# Altium PCB AirPi_Power.PcbDoc
Units mm, origin at the board's own origin, x right, y up, seen from the top; angles counter-clockwise.
Board outline 80.9 x 56.52 mm, 2 copper layers (Top Layer, Bottom Layer); 44 components, 29 nets, 174 pads, 33 vias.
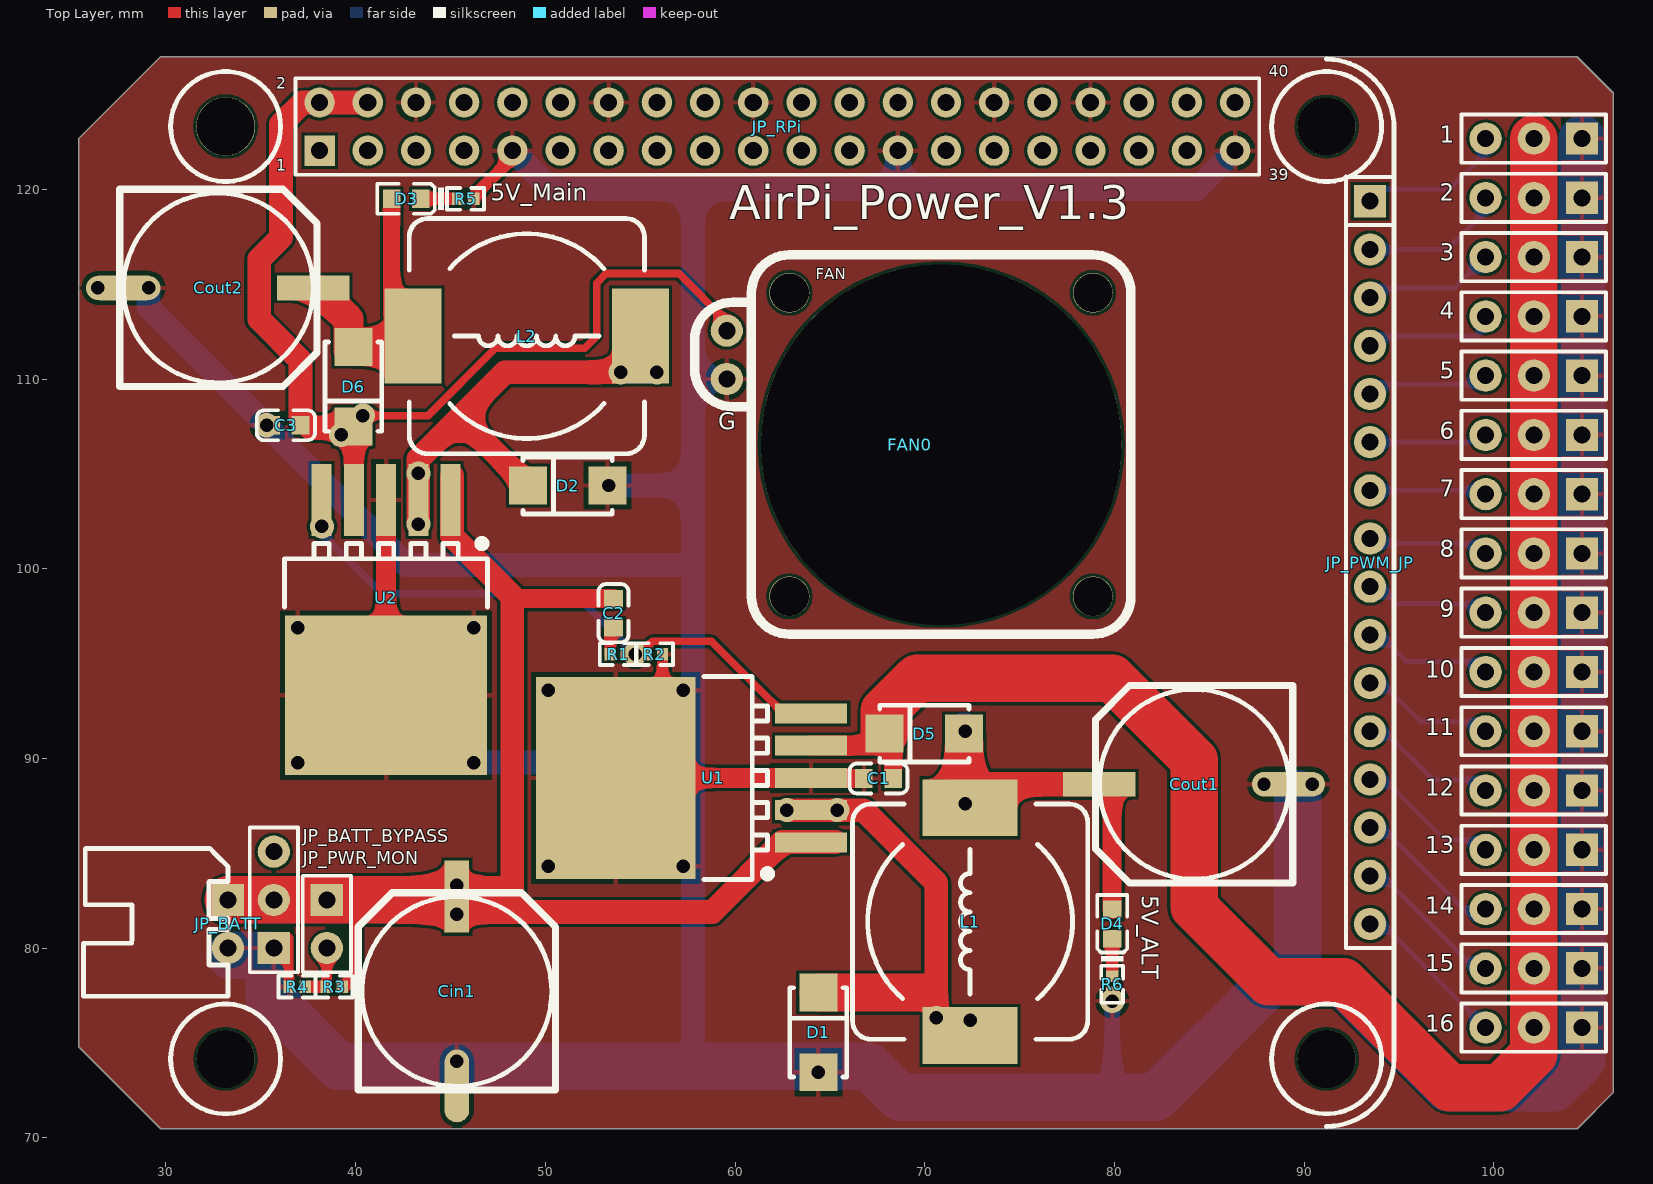
[diagram p0: Top Layer view]
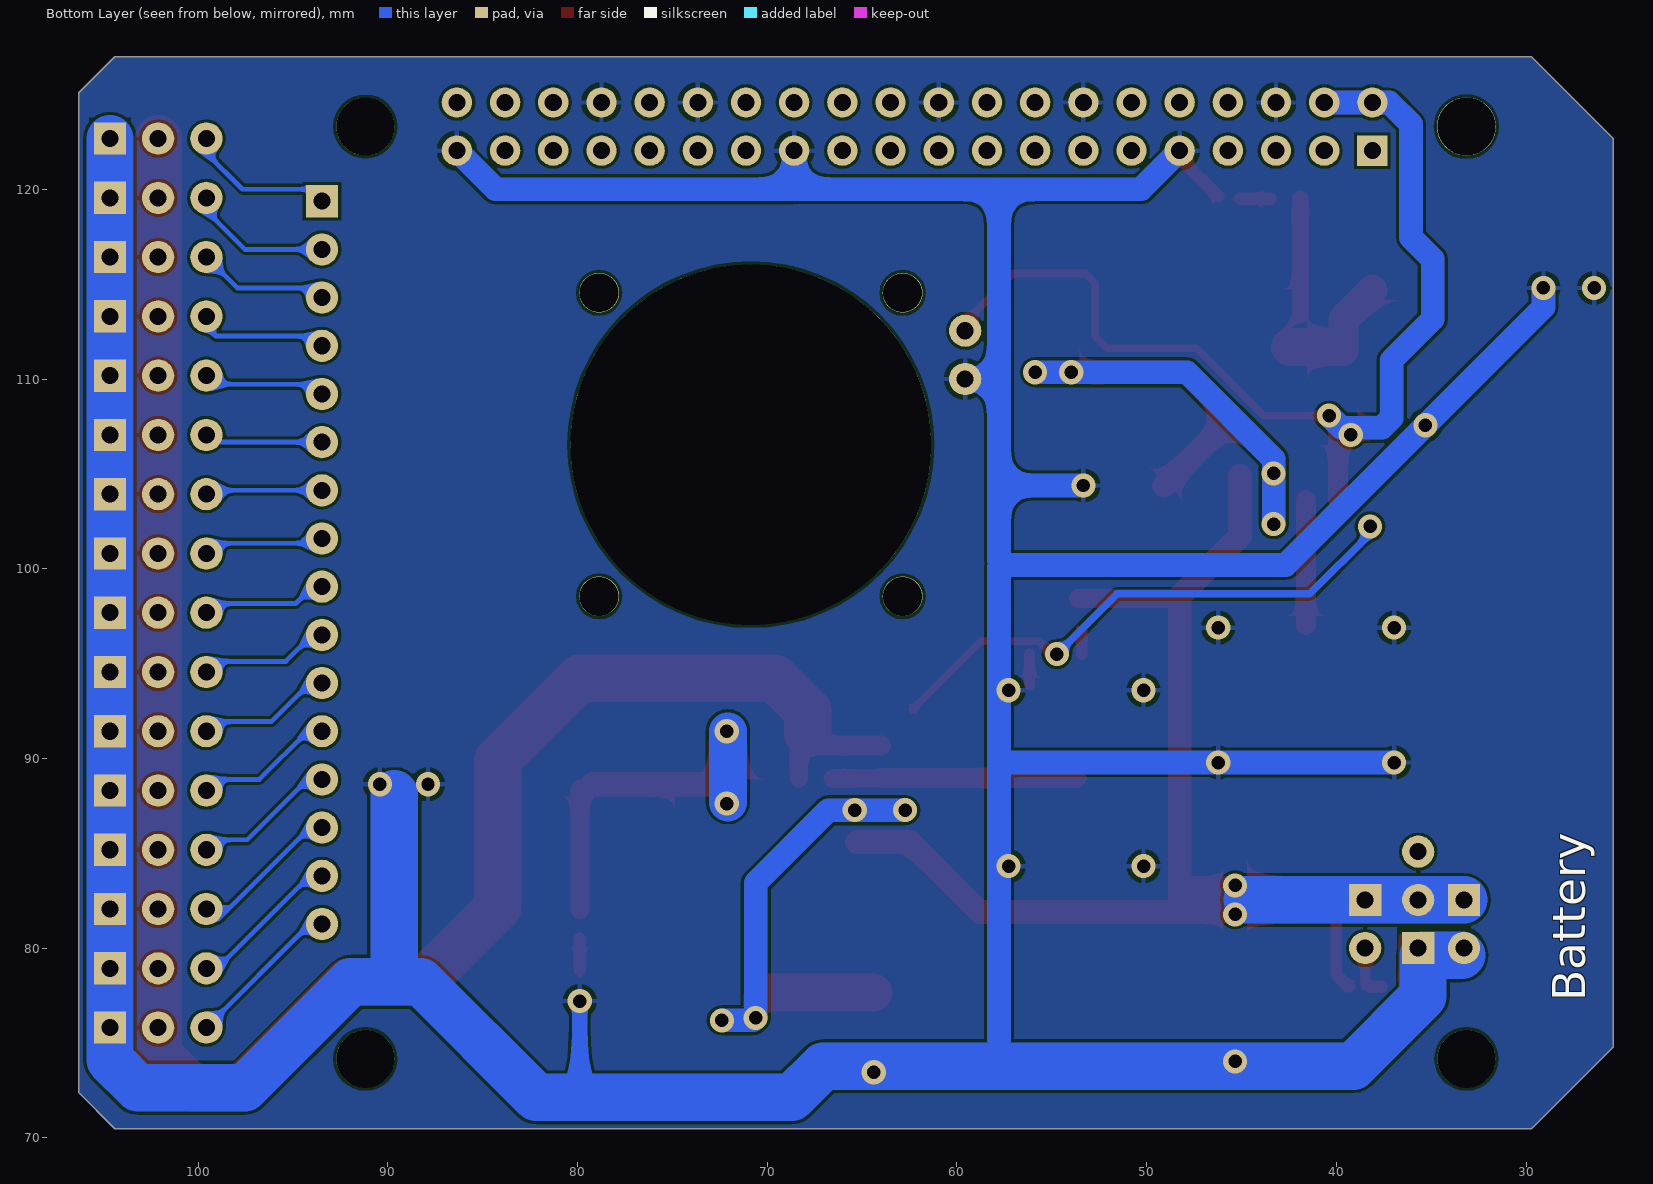
[diagram p1: Bottom Layer view, seen from below]

## Layer stack, top to bottom
Top Solder: solder mask 0.0102, Solder Resist, Dk 3.5
Top Layer: signal copper 0.0356
Dielectric 1: dielectric 0.32, FR-4, Dk 4.8
Bottom Layer: signal copper 0.0356
Bottom Solder: solder mask 0.0102, Solder Resist, Dk 3.5

## Board outline
29.718,127 25.4,122.682 25.4,74.803 29.718,70.485 104.394,70.485 106.299,72.39 106.299,125.095 104.394,127

## Design rules (kind name [scope] priority, off if disabled: settings)
Clearance [All] p1: gap=0.152 ignorepadtopadclearanceinfootprint=TRUE except(0: Arc-Hole Track-Hole SMDPad-Hole THPad-Hole Via-Hole Fill-Hole Poly-Hole Region-Hole Text-Hole)
DiffPairsRouting [All] p1: maxlimit=10 minlimit=0.152 mostfreqgap=0.254 toplayer_minwidth=0.152 toplayer_maxwidth=10 toplayer_prefwidth=0.254 bottomlayer_minwidth=0.152 bottomlayer_maxwidth=10 bottomlayer_prefwidth=0.254 maxuncoupledlength=12.7
PlaneConnect [All] p1: pad.planeconnectstyle=Relief pad.reliefexpansion=0.508 pad.reliefentries=4 pad.reliefconductorwidth=0.508 pad.reliefairgap=0.152 via.planeconnectstyle=Relief via.reliefexpansion=0.508 via.reliefentries=4 via.reliefconductorwidth=0.254 via.reliefairgap=0.254
PolygonConnect [All] p1: connectstyle=Relief reliefconductorwidth=0.254 reliefentries=4 polygonreliefangle="90 Angle" airgapwidth=0.254
RoutingTopology [All] p1: topology=Daisy_Simple
RoutingVias [All] p1: holewidth=0.711 width=1.27 viastyle="Through Hole" minholewidth=0.3 minwidth=0.6 maxholewidth=5 maxwidth=10
SolderMaskExpansion [All] p1: expansion=0.102
UnRoutedNet [All] p1: checkbadconnections=TRUE
Width [All] p1: maxlimit=10 minlimit=0.152 preferedwidth=0.254
26 further rules are at their usual default settings.

## Classes and differential pairs
net class PWM[15..0]: PWM0 PWM1 PWM2 PWM3 PWM4 PWM5 PWM6 PWM7 PWM8 PWM9 PWM10 PWM11 PWM12 PWM13 PWM14 PWM15
component class V_div: R3 R4
component class "to sensor": JP_PWR_MON
component class PiHAT_Power: 1 2 3 4 5 6 7 8 9 10 11 12 13 14 15 16 JP_PWM_JP JP_RPi
component class LM2596_0: C1 C2 C3 Cin1 Cout2 D1 D2 D3 D4 D5 D6 L1 L2 R1 R2 R5 R6 U1 U2
component class Fan: FAN0
component class Batt_src: JP_BATT
component class Batt_bypass: JP_BATT_BYPASS

## Components (designator, comment, footprint, x,y, rotation, side; value= is the part's Value field where it differs from the comment)
1 "HDR-1X3" HDR2.54-LI-3P 102.108,122.682 r180 top locked (schematic designator CH1)
2 "HDR-1X3" HDR2.54-LI-3P 102.108,119.558 r180 top locked (schematic designator CH2)
3 "HDR-1X3" HDR2.54-LI-3P 102.108,116.434 r180 top locked (schematic designator CH3)
4 "HDR-1X3" HDR2.54-LI-3P 102.108,113.309 r180 top locked (schematic designator CH4)
5 "HDR-1X3" HDR2.54-LI-3P 102.108,110.185 r180 top locked (schematic designator CH5)
6 "HDR-1X3" HDR2.54-LI-3P 102.108,107.061 r180 top locked (schematic designator CH6)
7 "HDR-1X3" HDR2.54-LI-3P 102.108,103.937 r180 top locked (schematic designator CH7)
8 "HDR-1X3" HDR2.54-LI-3P 102.108,100.813 r180 top locked (schematic designator CH8)
9 "HDR-1X3" HDR2.54-LI-3P 102.108,97.688 r180 top locked (schematic designator CH9)
10 "HDR-1X3" HDR2.54-LI-3P 102.108,94.564 r180 top locked (schematic designator CH10)
11 "HDR-1X3" HDR2.54-LI-3P 102.108,91.44 r180 top locked (schematic designator CH11)
12 "HDR-1X3" HDR2.54-LI-3P 102.108,88.316 r180 top locked (schematic designator CH12)
13 "HDR-1X3" HDR2.54-LI-3P 102.108,85.192 r180 top locked (schematic designator CH13)
14 "HDR-1X3" HDR2.54-LI-3P 102.108,82.067 r180 top locked (schematic designator CH14)
15 "HDR-1X3" HDR2.54-LI-3P 102.108,78.943 r180 top locked (schematic designator CH15)
16 "HDR-1X3" HDR2.54-LI-3P 102.108,75.819 r180 top locked (schematic designator CH16)
C1 "100nF (104) 10% 50V" 0603_C 67.564,88.95 r0 top locked
C2 "100nF (104) 10% 50V" 0603_C 53.594,97.663 r90 top locked
C3 "100nF (104) 10% 50V" 0603_C 36.322,107.569 r0 top locked
Cin1 "220uF/50V" "CM F(10*10.2)" 45.339,77.724 r90 top locked
Cout1 "1000uF/16V" "CM F(10*10.2)" 84.201,88.646 r180 top locked
Cout2 "1000uF/16V" "CM F(10*10.2)" 32.766,114.808 r0 top locked
D1 "SS54" SMA(DO-214AC)_S1 64.389,75.565 r270 top locked
D2 "SS54" SMA(DO-214AC)_S1 51.181,104.394 r0 top locked
D3 "红灯 0603" 0603_LED_S1 42.672,119.507 r180 top locked
D4 "红灯 0603" 0603_LED_S1 79.883,81.28 r90 top locked
D5 "SS54" SMA(DO-214AC)_S1 69.977,91.313 r0 top locked
D6 "SS54" SMA(DO-214AC)_S1 39.878,109.601 r90 top locked
FAN0 "20mm_5V_风扇" 20mmFAN 62.867,98.552 r0 top locked
JP_BATT "HDR-1X2" XH2.54-WI-2P 33.274,81.28 r270 top locked
JP_BATT_BYPASS "HDR-1X3" HDR2.54-LI-3P 35.687,82.55 r90 top locked
JP_PWM_JP "HDR-1X16" HDR2.54-M-LI-16P 93.472,100.33 r270 top locked
JP_PWR_MON "HDR-1X2" HDR2.54-M-LI-2P 38.481,81.28 r270 top
JP_RPi "Header 2X11" HDR2.54-LI-2x20P 62.23,123.317 r0 top locked
L1 "47uH" CDRH127 72.39,81.407 r90 top locked
L2 "47uH" CDRH127 49.022,112.268 r180 top locked
R1 "47KΩ (4702) ±1%" 0402_R 53.848,95.504 r0 top locked
R2 "47KΩ (4702) ±1%" 0402_R 55.753,95.504 r180 top locked
R3 "4.7KΩ (4701) ±1%" 0402_R 38.862,77.978 r0 top locked
R4 "1KΩ (1001) ±1%" 0402_R 36.913,77.978 r0 top locked
R5 "1KΩ (1001) ±1%" 0402_R 45.796,119.507 r180 top locked
R6 "1KΩ (1001) ±1%" 0402_R 79.883,78.105 r90 top locked
U1 "LM2596SX-5.0/NOPB" TO-263-5 64.008,88.978 r0 top locked
U2 "LM2596SX-5.0/NOPB" TO-263-5 41.607,103.632 r90 top locked

## Footprints (in the part's own frame and the unit in brackets; to place one, negate y for a bottom-side part, rotate by r counter-clockwise, add the part's x,y. Pads: shape width x height; smd on the part's side, far side on the other; paste and mask are expansions set on the pad)
20mmFAN [mm] "20mm_5V_风扇"
  round 1.7 hole 0.9: 6(-3.3,11.46) 7(-3.3,14)
  round 2.1 hole 2.05: 8(0,0) 9(0,16) 10(16,16) 11(16,0)
  round 19 hole 19: 12(8,8)
  silkscreen extent -5,-2 18,18
0402_R [mm]
  rect 0.6x0.65 smd mask+0.051: 1(-0.425,0) 2(0.425,0)
  silkscreen extent -0.97,-0.58 0.97,0.58, body extent -0.57,-0.27 0.58,0.28, height 0.41
0603_C [mm]
  rect 0.93x0.98 smd: 1(-0.77,0) 2(0.77,0)
  silkscreen extent -1.53,-0.79 1.54,0.79, body extent -0.8,-0.4 0.8,0.4, height 0.3
0603_LED_S1 [mm]
  rect 0.93x0.98 smd: A(0.77,0) K(-0.77,0)
  silkscreen extent -1.98,-0.79 1.54,0.79, body extent -0.8,-0.4 0.8,0.4, height 0.6
CDRH127 [mm] "12*12*8mm（长宽高）"
  rect 3x5 smd: 1(-6,0) 2(6,0)
  silkscreen extent -6.2,-6.2 6.2,6.2, body extent -6,-6 6,6, height 7.8
"CM F(10*10.2)" [mm] "贴片电解电容，直径10mm，高10.2mm"
  rect 3.8x1.3 smd: 1(5,0)
  oval 3.8x1.3 smd: 2(-5,0)
  silkscreen extent -5.2,-5.2 5.2,5.2, body extent -5.8,-5.15 5.8,5.15, height 10.2
HDR2.54-LI-2x20P [mm] "双排排针，20x2脚"
  rect 1.6x1.6 hole 0.9: 1(-24.13,-1.27)
  round 1.6 hole 0.9: 2(-24.13,1.27) 3(-21.59,-1.27) 4(-21.59,1.27) 5(-19.05,-1.27) 6(-19.05,1.27) 7(-16.51,-1.27) 8(-16.51,1.27) 9(-13.97,-1.27) 10(-13.97,1.27) 11(-11.43,-1.27) 12(-11.43,1.27) 13(-8.89,-1.27) 14(-8.89,1.27) 15(-6.35,-1.27) 16(-6.35,1.27) 17(-3.81,-1.27) 18(-3.81,1.27) 19(-1.27,-1.27) 20(-1.27,1.27) 21(1.27,-1.27) 22(1.27,1.27) 23(3.81,-1.27) 24(3.81,1.27) 25(6.35,-1.27) 26(6.35,1.27) 27(8.89,-1.27) 28(8.89,1.27) 29(11.43,-1.27) 30(11.43,1.27) 31(13.97,-1.27) 32(13.97,1.27) 33(16.51,-1.27) 34(16.51,1.27) 35(19.05,-1.27) 36(19.05,1.27) 37(21.59,-1.27) 38(21.59,1.27) 39(24.13,-1.27) 40(24.13,1.27)
  silkscreen extent -25.4,-2.54 25.4,2.54, body extent -25.4,-2.54 25.4,2.54, height 8.5
HDR2.54-LI-3P [mm] "排针，3脚"
  rect 1.7x1.7 hole 0.9: 1(-2.54,0)
  round 1.7 hole 0.9: 2(0,0) 3(2.54,0)
  silkscreen extent -3.81,-1.27 3.81,1.27, body extent -3.81,-1.27 3.81,1.27, height 8.5
HDR2.54-M-LI-2P [mm] "排母，2脚"
  rect 1.7x1.7 hole 0.9: 1(-1.27,0)
  round 1.7 hole 0.9: 2(1.27,0)
  silkscreen extent -2.54,-1.27 2.54,1.27, body extent -2.54,-1.27 2.54,1.27, height 8.5
HDR2.54-M-LI-16P [mm] "排母，16脚"
  rect 1.7x1.7 hole 0.9: 1(-19.05,0)
  round 1.7 hole 0.9: 2(-16.51,0) 3(-13.97,0) 4(-11.43,0) 5(-8.89,0) 6(-6.35,0) 7(-3.81,0) 8(-1.27,0) 9(1.27,0) 10(3.81,0) 11(6.35,0) 12(8.89,0) 13(11.43,0) 14(13.97,0) 15(16.51,0) 16(19.05,0)
  silkscreen extent -20.32,-1.27 20.32,1.27, body extent -20.32,-1.27 20.32,1.27, height 8.5
SMA(DO-214AC)_S1 [mm]
  rect 2x2 smd: 1(2.1,0) 2(-2.1,0)
  silkscreen extent -2.35,-1.5 2.35,1.5
TO-263-5 [mm]
  rect 3.8x1.05 smd: 1(0,-3.4) 2(0,-1.7) 3(0,0) 4(0,1.7) 5(0,3.4)
  rect 8.4x10.65 smd: ""(-10.3,0)
  silkscreen extent -5.65,-5.35 -2.1,5.35
XH2.54-WI-2P [mm] "接插件，2P"
  rect 1.7x1.7 hole 0.9: 1(-1.27,0)
  round 1.7 hole 0.9: 2(1.27,0)
  silkscreen extent -3.99,-7.62 3.81,0, body extent -3.77,-7.35 3.77,0.35, height 5.73

## Part data
1 2 3 4 5 6 7 8 9 10 11 12 13 14 15 16 JP_BATT_BYPASS: library part "Header 3", "3P接插件", BOM名称=3P接插件, 学习资源=www.ooocke.com, 版权归属=源创客
C1 C2 C3: library part "0603 100nF (104) 10% 50V", "贴片电容", Package=0603, SuppliersPartNumber=C14663, ComponentLink1Description=供应商链接, ComponentLink1URL=http://www.szlcsc.com/product/details_15331.html, Supplier=LC
Cin1 Cout1 Cout2: library part C-CM, "贴片电解电容"
D1 D2 D5 D6: library part "SMA(DO-214AC) SS54", "二极管", Package=SMA(DO-214AC), SuppliersPartNumber=C22452, ComponentLink1Description=供应商链接, ComponentLink1URL=http://www.szlcsc.com/product/details_23178.html, Supplier=LC
D3 D4: library part "0603 红灯", "发光二极管", Package=0603, SuppliersPartNumber=C2286, ComponentLink1Description=供应商链接, ComponentLink1URL=http://www.szlcsc.com/product/details_2659.html, Supplier=LC
FAN0: library part 20mmFAN
JP_BATT JP_PWR_MON: library part "Header 2", "2P接插件", BOM名称=2P接插件, 学习资源=www.ooocke.com, 版权归属=源创客
JP_PWM_JP: library part "Header 16", "16P接插件", BOM名称=16P接插件, 学习资源=www.ooocke.com, 版权归属=源创客
JP_RPi: library part "Header 20X2", "20*2P接插件"
L1 L2: library part L-CDRH, "功率屏蔽电感"
R1 R2: library part "0402 47KΩ (4702) 1%", "贴片电阻", Package=0402, SuppliersPartNumber=C25792, ComponentLink1Description=供应商链接, ComponentLink1URL=http://www.szlcsc.com/product/details_26535.html, Supplier=LC
R3: library part "0402 4.7KΩ (4701) 1%", "贴片电阻", Package=0402, SuppliersPartNumber=C25900, ComponentLink1Description=供应商链接, ComponentLink1URL=http://www.szlcsc.com/product/details_26643.html, Supplier=LC
R4 R5 R6: library part "0402 1KΩ (1001) 1%", "贴片电阻", Package=0402, SuppliersPartNumber=C11702, ComponentLink1Description=供应商链接, ComponentLink1URL=http://www.szlcsc.com/product/details_12256.html, Supplier=LC
U1 U2: library part LM2596SX-5.0/NOPB_[C10002], "DC-DCоƬ", Package=TO-263-5, SuppliersPartNumber=C10002, ComponentLink1Description=供应商链接, ComponentLink1URL=http://www.szlcsc.com/product/details_10538.html, Supplier=LC

## Free pads (board coordinates)
  round 3.1 hole 3.05: FH0(33.147,123.317)
  round 3.05 hole 3.05: FH1(91.186,123.317) FH2(91.186,74.168) FH3(33.147,74.168)

## Via types
v1: diameter 1.27, hole 0.711, Top Layer to Bottom Layer, 33 vias

## Nets (pads, with @x,y where several pads share a name; then routed paths per layer and width w, separated by ;. In a path a pad name is that pad's centre, name@x,y a point inside that pad or via, vN(x,y) a via of type N, cw(c..) or ccw(c..) an arc to the next point about the centre after c; other vN are vias at no path point)
5V: C3.2 D6.2 FAN0.7 JP_RPi.2 JP_RPi.4 U2.4 | length 80
  Top Layer w0.254: D6.2@39.81,107.569 D6.2 D6.2@39.907,107.472
  Top Layer w0.4: v1(40.386,108.077) 43.815,108.077 47.371,111.633 52.07,111.633 52.705,112.268 52.705,115.062 53.213,115.57 57.023,115.57 59.567,113.026 FAN0.7
  Top Layer w1.05: U2.4 D6.2@39.907,107.472
  Top Layer w1.25: D6.2@39.878,107.442 37.592,107.442 37.092,107.942 37.092,110.99 34.925,113.157 34.925,116.332 36.068,117.475 36.068,123.444 37.211,124.587 JP_RPi.2 JP_RPi.4
  Bottom Layer w1.25: v1(40.386,108.077) 39.751,107.442 37.592,107.442 37.084,107.95 37.084,110.998 34.925,113.157 34.925,116.332 36.068,117.475 36.068,123.444 37.211,124.587 JP_RPi.2 JP_RPi.4
  other v1: 39.243,107.061
5V_ALT: 1.2 2.2 3.2 4.2 5.2 6.2 7.2 8.2 9.2 10.2 11.2 12.2 13.2 14.2 15.2 16.2 C1.2 D5.2 U1.4 | length 105.3
  Top Layer w0.254: D5.2@67.242,90.678 D5.2 D5.2@68.334,90.856
  Top Layer w0.94: C1.2 D5.2@68.334,90.856
  Top Layer w1.05: U1.4 D5.2@67.242,90.678
  Top Layer w2.5: D5.2 67.877,92.515 69.596,94.234 79.883,94.234 84.201,89.916 84.201,82.169 88.138,78.232 92.075,78.232 97.663,72.644 100.33,72.644 102.108,74.422 16.2 14.2 12.2 11.2 10.2 8.2 5.2 3.2 1.2
GND: 1.1 2.1 3.1 4.1 5.1 6.1 7.1 8.1 9.1 10.1 11.1 12.1 13.1 14.1 15.1 16.1 C1.1 C3.1 Cin1.2 Cout1.2 Cout2.2 D1.1 D2.1 FAN0.6 JP_BATT.2 JP_BATT_BYPASS.1 JP_RPi.6 JP_RPi.9 JP_RPi.14 JP_RPi.20 JP_RPi.25 JP_RPi.30 JP_RPi.34 JP_RPi.39 R2.1 R4.1 R5.1 R6.1 U1. U1.3 U2. U2.3 | length 319.3
  Top Layer w0.254: U1.3 U1.3@64.036,88.95
  Top Layer w0.5: R4.1 JP_BATT_BYPASS.1@36.488,80.518
  Top Layer w0.6: U1.@56.178,93.897 R2.1
  Top Layer w0.65: R5.1@46.221,119.627 JP_RPi.9@48.133,121.539
  Top Layer w0.97: U1.3@64.036,88.95 C1.1@66.548,88.95
  Top Layer w1.05: U2.@41.607,97.028 U2.3 ; U1. U1.3
  Bottom Layer w0.8: 79.883,72.136 v1(79.883,77.216)
  Bottom Layer w1.25: v1(29.083,114.808) 29.083,113.792 v1(35.306,107.569) 42.672,100.203 57.531,100.203 57.785,100.457 57.785,104.394 ; v1@37.084,89.789 56.769,89.789 57.785,89.789 57.785,93.599 57.785,100.076 ; JP_RPi.9 50.292,120.015 57.785,120.015 ; v1(53.34,104.394) 57.785,104.394 ; 57.785,75.184 57.785,89.535 ; FAN0.6 59.537,109.982 57.785,109.982 ; JP_RPi.25 68.58,120.015 ; JP_RPi.39 84.328,120.015 68.58,120.015 ; 57.785,104.394 57.785,109.982 ; 57.785,109.982 57.785,120.015 ; 57.785,120.015 68.58,120.015
  Bottom Layer w2.5: JP_BATT.2@33.401,79.629 35.433,79.629 35.433,77.47 39.116,73.787 45.339,73.787 64.389,73.787 67.056,73.787 68.707,72.136 79.883,72.136 82.169,72.136 88.265,78.232 89.662,78.232 ; 89.662,88.138 89.662,78.232 ; 1.1 3.1 5.1 6.1 8.1 10.1 11.1 12.1 14.1 16.1 104.648,74.108 103.184,72.644 97.536,72.644 91.948,78.232 89.662,78.232
  other v1: 64.389,73.465 45.339,74.041 50.165,84.328 57.277,84.328 87.884,88.646 90.424,88.646 36.957,89.789 46.228,89.789 50.165,93.599 57.277,93.599 36.957,96.901 46.228,96.901 26.416,114.808
LED: Cout2.1 D3.A D6.1 L2.2 | length 14.9
  Top Layer w0.254: L2.2@41.902,113.388 L2.2 L2.2@42.455,111.701
  Top Layer w0.9: L2.2@41.902,113.388 D3.A
  Top Layer w1.6: Cout2.1@38.1,114.681 39.624,113.157 D6.1@39.624,111.506
  Top Layer w2: D6.1 L2.2@42.455,111.701
LED_ALT: Cout1.1 D4.A D5.1 L1.2 | length 20.5
  Top Layer w1: D4.A Cout1.1@79.883,88.392
  Top Layer w1.3: L1.2@72.39,88.646 Cout1.1
  Top Layer w2: L1.2@72.077,87.72 D5.1
  Bottom Layer w2: v1@72.077,87.689 v1@72.077,91.439
  other v1: 72.136,87.63 72.136,91.44
NetC2_1: C2.1 R1.1 | length 1.5
  Top Layer w0.254: C2.1@53.423,96.722 C2.1
  Top Layer w0.6: R1.1 C2.1@53.423,96.722
NetC2_2: C2.2 Cin1.1 JP_BATT.1 JP_BATT_BYPASS.2 JP_PWR_MON.1 R3.2 U1.1 U2.1 | length 78.9
  Top Layer w0.254: 48.26,98.552 48.379,98.433
  Top Layer w0.6: R3.2 39.37,77.978 40.005,78.613 40.005,81.788
  Top Layer w1: 48.379,98.433 C2.2
  Top Layer w1.25: U2.1@45.085,104.902 45.085,101.727 48.26,98.552 48.26,82.804 48.006,82.55 ; 47.625,82.169 47.371,81.915 58.801,81.915 62.484,85.598 U1.1@65.278,85.598
  Top Layer w2.5: JP_BATT.1 JP_PWR_MON.1 47.625,82.55
  Bottom Layer w2.5: JP_BATT.1 JP_PWR_MON.1 44.704,82.55
  other v1: 45.339,81.788 45.339,83.312
NetD1_2: D1.2 L1.1 U1.2 | length 41.2
  Top Layer w0.254: 70.104,77.597 70.612,77.597
  Top Layer w1.25: v1(62.738,87.278) U1.2 v1(65.391,87.278) 66.773,87.278 70.612,83.439 70.612,77.597 v1(70.612,76.327)
  Top Layer w2: D1.2 70.036,77.665 70.104,77.597
  Bottom Layer w1.25: v1(62.738,87.278) v1(65.391,87.278) 66.773,87.278 70.612,83.439 v1(70.612,76.327) 70.739,76.2 v1(72.39,76.2)
NetD2_2: D2.2 L2.1 U2.2 | length 39
  Top Layer w1.25: v1(43.307,102.362) U2.2 v1(43.307,105.029) 43.307,105.791 45.495,107.979 ; D2.2 45.495,107.979 ; v1(53.975,110.363) 47.879,110.363 45.495,107.979
  Bottom Layer w1.25: v1(43.307,102.362) v1(43.307,105.029) 43.307,105.791 47.879,110.363 v1(53.975,110.363) v1(55.88,110.363)
NetD3_K: D3.K R5.2 | length 1.9
  Top Layer w0.254: R5.2@45.085,119.507 R5.2
  Top Layer w0.64: D3.K R5.2@45.085,119.507
NetD4_K: D4.K R6.2 | length 2
  Top Layer w0.254: R6.2 79.883,78.867
  Top Layer w0.65: 79.883,78.867 D4.K
NetJP_PWR_MON_2: JP_PWR_MON.2 R3.1 R4.2 | length 2.9
  Top Layer w0.254: R3.1@38.227,77.978 R3.1 R3.1@38.481,78.022
  Top Layer w0.5: R3.1@38.481,78.022 JP_PWR_MON.2
  Top Layer w0.65: R4.2@37.592,77.978 R3.1@38.227,77.978
NetR1_2: R1.2 R2.2 U1.5 U2.5 | length 28.9
  Top Layer w0.4: v1(54.737,95.504) 54.972,95.504 55.65,96.181 58.759,96.181 U1.5@62.357,92.583
  Bottom Layer w0.4: v1(38.227,102.235) 38.227,101.854 41.402,98.679 51.562,98.679 v1(54.737,95.504)
PWM0: 1.3 JP_PWM_JP.1 | length 6.3
  Bottom Layer w0.254: JP_PWM_JP.1@94.107,120.015 97.663,120.015 1.3@99.568,121.92
PWM1: 2.3 JP_PWM_JP.2 | length 6.9
  Bottom Layer w0.254: JP_PWM_JP.2 97.536,116.84 2.3@99.568,118.872
PWM2: 3.3 JP_PWM_JP.3 | length 6.3
  Bottom Layer w0.254: JP_PWM_JP.3@93.98,114.808 97.942,114.808 3.3
PWM3: 4.3 JP_PWM_JP.4 | length 5.8
  Bottom Layer w0.254: JP_PWM_JP.4@93.98,112.268 99.06,112.268 4.3@99.568,112.776
PWM4: 5.3 JP_PWM_JP.5 | length 5.1
  Bottom Layer w0.254: JP_PWM_JP.5@93.98,109.728 5.3@99.111,109.728
PWM5: 6.3 JP_PWM_JP.6 | length 5.9
  Bottom Layer w0.254: JP_PWM_JP.6 98.796,106.68 6.3@99.177,107.061
PWM6: 7.3 JP_PWM_JP.7 | length 5.9
  Bottom Layer w0.254: JP_PWM_JP.7 7.3@99.365,104.14
PWM7: 8.3 JP_PWM_JP.8 | length 5.3
  Bottom Layer w0.254: JP_PWM_JP.8@93.726,101.346 8.3@99.035,101.346
PWM8: 9.3 JP_PWM_JP.9 | length 5.5
  Bottom Layer w0.254: JP_PWM_JP.9@93.98,99.06 94.869,98.171 9.3@99.085,98.171
PWM9: 10.3 JP_PWM_JP.10 | length 5.6
  Bottom Layer w0.254: JP_PWM_JP.10@93.98,96.52 95.377,95.123 10.3@99.009,95.123
PWM10: 11.3 JP_PWM_JP.11 | length 5.8
  Bottom Layer w0.254: JP_PWM_JP.11@94.107,93.98 96.139,91.948 11.3@99.06,91.948
PWM11: 12.3 JP_PWM_JP.12 | length 5.8
  Bottom Layer w0.254: JP_PWM_JP.12@94.234,91.44 96.774,88.9 12.3@98.984,88.9
PWM12: 13.3 JP_PWM_JP.13 | length 6.1
  Bottom Layer w0.254: JP_PWM_JP.13@94.234,88.9 97.409,85.725 13.3@99.035,85.725
PWM13: 14.3 JP_PWM_JP.14 | length 7.7
  Bottom Layer w0.254: JP_PWM_JP.14@94.107,86.36 98.933,81.534 14.3@99.822,81.534
PWM14: 15.3 JP_PWM_JP.15 | length 6.9
  Bottom Layer w0.254: JP_PWM_JP.15@94.107,83.82 15.3@98.984,78.943
PWM15: 16.3 JP_PWM_JP.16 | length 7.7
  Bottom Layer w0.254: JP_PWM_JP.16@94.107,81.28 16.3
pads on no net: FAN0.8 FAN0.9 FAN0.10 FAN0.11 FAN0.12 JP_BATT_BYPASS.3 JP_RPi.1 JP_RPi.3 JP_RPi.5 JP_RPi.7 JP_RPi.8 JP_RPi.10 JP_RPi.11 JP_RPi.12 JP_RPi.13 JP_RPi.15 JP_RPi.16 JP_RPi.17 JP_RPi.18 JP_RPi.19 JP_RPi.21 JP_RPi.22 JP_RPi.23 JP_RPi.24 JP_RPi.26 JP_RPi.27 JP_RPi.28 JP_RPi.29 JP_RPi.31 JP_RPi.32 JP_RPi.33 JP_RPi.35 JP_RPi.36 JP_RPi.37 JP_RPi.38 JP_RPi.40
copper on no net: | length 2.1
  Bottom Layer w0.254: 89.934,123.317 91.186,123.317 90.551,122.682

## Polygon pours and split planes (outlines as drawn)
GND on Bottom Layer (solid, pour order 8): 29.718,127 104.394,127 106.299,125.095 106.299,72.39 104.394,70.485 29.718,70.485 25.4,74.803 25.4,122.682
GND on Top Layer (solid, pour order 12): 25.4,74.803 25.4,122.682 29.718,127 104.394,127 106.299,125.095 106.299,72.39 104.394,70.485 29.718,70.485

## Silkscreen, mask and mechanical layers (free items; w line width, h text height)
Top Overlay:
  circle w0.254: c91.186,123.317 r2.899
  circle w0.254: c33.147,123.317 r2.899
  circle w0.254: c33.147,74.168 r2.899
  circle w0.254: c91.186,74.168 r2.899
  lines w0.254: 91.186,70.612 ccw(c91.186,74.168) 94.742,74.168 94.742,123.19 ccw(c91.123,123.253) 91.186,126.873 ; 92.202,120.602 92.202,120.65
  text "5V_Main" at 47.117,119.126 h1.52
  text "AirPi_Power_V1.3" at 59.69,117.856 h3.05
  text "5V_ALT" at 81.153,82.804 h1.52 r270
Bottom Overlay:
  text "Battery" at 26.289,77.216 h3 r270
Top Solder:
  lines w1.6: 33.274,80.01 35.687,80.01
  lines w2: 39.878,111.701 41.91,111.701 ; 72.077,87.503 72.077,91.096
  lines w2.5: 67.847,92.485 69.596,94.234 79.883,94.234 84.201,89.916 84.201,82.169 88.138,78.232 92.075,78.232 97.663,72.644 100.33,72.644 102.108,74.422 102.108,122.682 ; 67.877,91.313 67.877,92.456
Bottom Solder:
  lines w0.254: 66.802,87.249 66.929,87.249 ; 104.648,74.041 104.648,74.168
  lines w1.25: 40.386,108.077 39.751,107.442 37.592,107.442 37.084,107.95 37.084,110.998 34.925,113.157 34.925,116.332 36.068,117.475 36.068,123.444 37.211,124.587 40.64,124.587 ; 43.307,102.362 43.307,105.791 47.879,110.363 55.88,110.363 ; 62.738,87.278 66.802,87.278 ; 66.802,87.249 70.612,83.439 70.612,76.2 72.39,76.2
  lines w2: 72.077,87.63 72.077,91.44
  lines w2.5: 33.401,79.629 34.798,79.629 ; 35.433,79.629 35.433,77.47 39.116,73.787 67.056,73.787 68.707,72.136 82.169,72.136 88.265,78.232 91.948,78.232 97.536,72.644 103.251,72.644 104.648,74.041 ; 104.648,74.168 104.648,122.682
Mechanical 1:
  lines w0.254: 25.527,76.2 ccw(c28.702,76.2) 26.457,73.955 28.87,71.542 ccw(c31.115,73.787) 31.115,70.612 102.997,70.612 ccw(c102.997,73.787) 106.172,73.787 106.172,123.698 ccw(c102.997,123.698) 102.997,126.873 31.115,126.873 ccw(c31.115,123.698) 28.87,125.943 26.457,123.53 ccw(c28.702,121.285) 25.527,121.285 25.527,76.2
Mechanical 13:
  lines w0.254: 25.527,76.2 ccw(c28.702,76.2) 26.457,73.955 28.87,71.542 ccw(c31.115,73.787) 31.115,70.612 102.997,70.612 ccw(c102.997,73.787) 106.172,73.787 106.172,123.698 ccw(c102.997,123.698) 102.997,126.873 31.115,126.873 ccw(c31.115,123.698) 28.87,125.943 26.457,123.53 ccw(c28.702,121.285) 25.527,121.285 25.527,76.2

## Text inside footprints (layer, text, board x,y; h text height)
FAN0: Top Overlay "FAN" at 64.267,115.052 h1; Top Overlay "G" at 59.117,107.052 h1.52
JP_RPi: Top Overlay "39" at 88.138,120.269 h1.02; Top Overlay "40" at 88.138,125.73 h1.02; Top Overlay "2" at 35.814,125.095 h1.02; Top Overlay "1" at 35.814,120.777 h1.02